# Altium PCB PCB.pcbdoc (part 2 of 2)
Units mil, origin at the board's own origin, x right, y up, seen from the top; angles counter-clockwise.
Board outline 3007 x 2843 mil, 2 copper layers (Top Layer, Bottom Layer); 56 components, 63 nets, 248 pads, 115 vias.
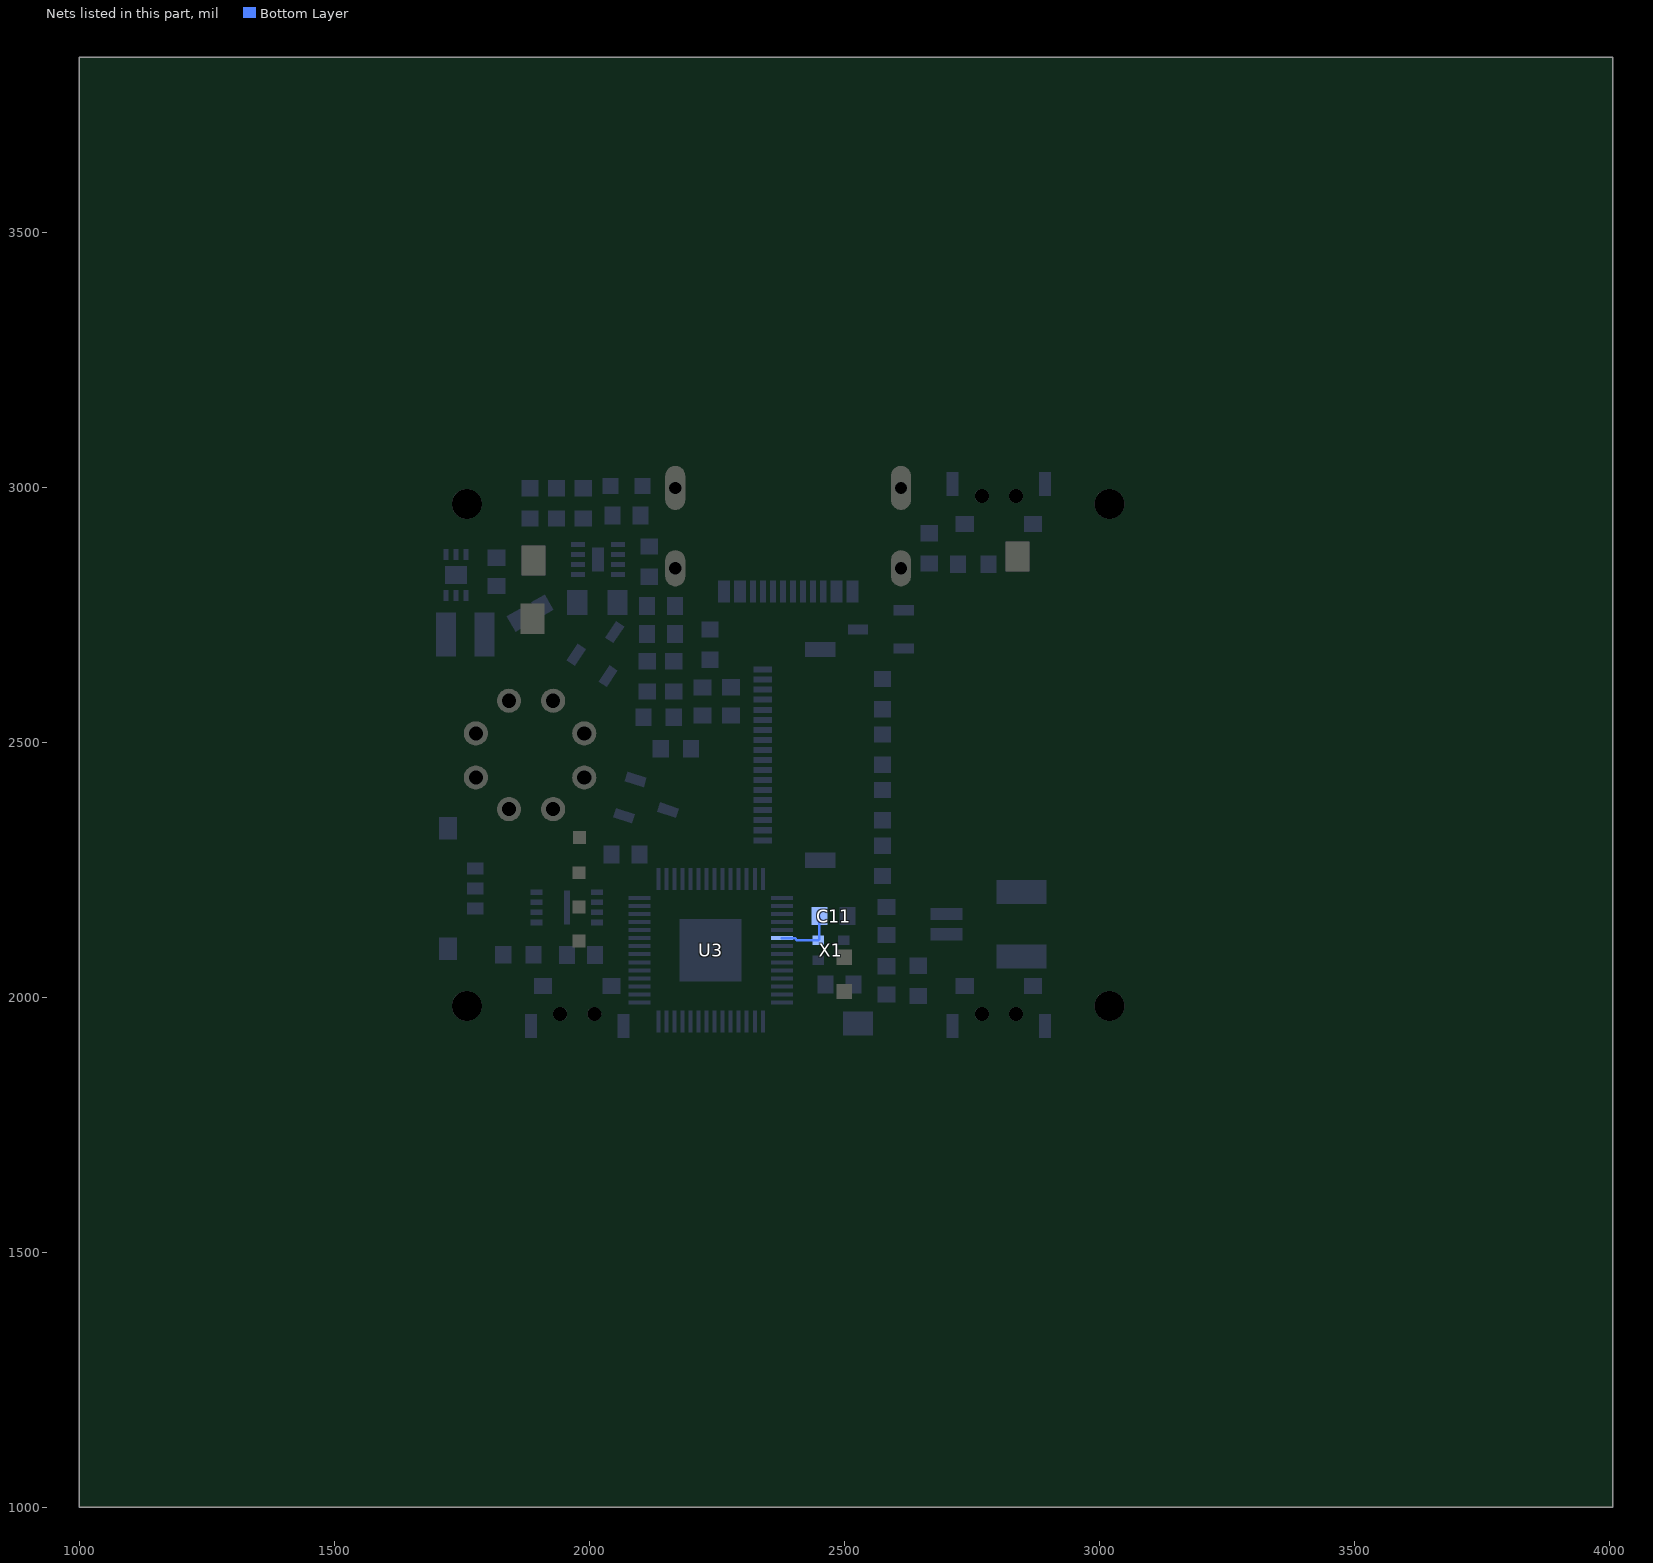
[diagram p2: the nets of this part, all layers, seen from the top]

## Via types
v1: diameter 24.41, hole 12.2, Top Layer to Bottom Layer, tented both sides, 77 vias
v2: diameter 17.72, hole 7.87, Top Layer to Bottom Layer, tented both sides, 36 vias
v3: diameter 23.62, hole 11.81, Top Layer to Bottom Layer, tented both sides, 2 vias

## Nets (pads, with @x,y where several pads share a name; then routed paths per layer and width w, separated by ;. In a path a pad name is that pad's centre, name@x,y a point inside that pad or via, vN(x,y) a via of type N, cw(c..) or ccw(c..) an arc to the next point about the centre after c; other vN are vias at no path point) (continued)
XTAL_P: C11.2 U3.20 X1.3 | length 121.9
  Bottom Layer w5: U3.20@2377.74,2115.66 2403.34,2115.66 2407.74,2111.16 2448.84,2111.16 2451.44,2113.76 C11.2@2451.45,2159
pads on no net: SW1. SW2. SW3. SW4.1 U1.1 U3.13 U3.17 U3.18 U3.27 U3.28 U3.29 U3.30 U3.31 U3.32 U3.34 U3.35 U3.37 U3.39 U3.40 U3.41 U5.9 U7.2 USB2.3 USB2.9

## Polygon pours and split planes (outlines as drawn)
GND on Top Layer (solid): 1514,3265 3236,3265 3336,3165 3336,1808 3307,1779 1521,1779 1514,1786
GND on Bottom Layer (solid): 1507,3343 3486,3343 3507,3322 3507,1586 3421,1500 1586,1500 1500,1586

## Keep-outs
Keep-Out Layer:
  lines w10: 3019.84,1904.02 ccw(c3019.84,1982.76) 3098.58,1982.76 ; 3019.84,3045.75 cw(c3019.84,2967.01) 3098.58,2967.01
  lines w10 net S$37925: 2665.51,2730.78 cw(c2724.57,2730.78) 2724.57,2789.84 ; 2842.68,2789.84 ccw(c2842.68,2848.89) 2901.73,2848.89
  lines w10 net S$70340: 1681.26,1982.76 ccw(c1760,1982.76) 1760,1904.02 ; 1681.26,2966.13 cw(c1760,2967.01) 1760.81,3045.74

## Other copper
Top Layer:
  region net SWCLK: 2487.5,2093 2512.5,2093 2505,2102 2495,2102
  region net SWD: 2485,1998.5 2485,2023.5 2470,2016 2470,2006
  region net U0_TX0: 1992.5,2183.25 1992.5,2170.75 2000,2174.5 2000,2179.5
  region net U0_RX0: 1992.5,2250.25 1992.5,2237.75 2000,2241.5 2000,2246.5
  region net SWD: 2437.09,2002.38 2431.58,2014.47 2437.7,2016 2442.25,2006
  region net RST: 2375.57,1947.19 2362.84,1934.04 2359.58,1942.96 2366.54,1950.15
  region net SWCLK: 2427.14,2023.36 2427.14,2036.64 2420.94,2035 2420.94,2025
  region net U0_TX0: 2146.14,2190.36 2146.14,2203.64 2139.94,2199.5 2139.94,2194.5
  region net U0_RX0: 2188.55,2204.84 2179.16,2195.45 2177.7,2202.76 2181.24,2206.3
  region net 3V3: 2293.64,2449.86 2280.36,2449.86 2282,2456.06 2292,2456.06
  region net 3V3: 2161.64,2302.86 2148.36,2302.86 2150,2309.06 2160,2309.06
  region net ADC: 2540.99,2128.14 2540.95,2109.83 2532.41,2115 2532.43,2123
  region net ADC: 2216.84,1995.44 2207.45,2004.84 2213.7,2007.36 2219.36,2001.7
  region net KEY: 2252.6,1990.86 2245.05,2001.8 2252.49,2001.94 2255.37,1997.75
  region net 1.1V: 2440.93,1969.85 2440.93,1988.15 2432.38,1984 2432.38,1974
  region net 1.1V: 2335.15,2086.93 2316.85,2086.92 2321,2078.38 2331,2078.39
  region net SCL: 2446.65,2198.55 2435.28,2205.42 2433.35,2199.34 2442.16,2194.01
  region net SDA: 2425.64,2212.86 2412.36,2212.86 2414,2219.06 2424,2219.06
  region net USB_D-: 2147.64,2047.86 2134.36,2047.86 2138.5,2053 2143.5,2053
  region net USB_D+: 2157.56,2070.84 2148.16,2061.45 2146.71,2068.76 2150.24,2072.3
  region net TP_SDA: 2209.84,2346.44 2200.44,2355.84 2207.76,2357.29 2211.29,2353.76
  region net TP_SCL: 2223.86,2369.36 2223.86,2382.64 2230.06,2378.5 2230.06,2373.5
  region net TP_SDA: 2283.14,2379.36 2283.14,2392.64 2276.94,2388.5 2276.94,2383.5
  region net TP_SCL: 2286.14,2406.36 2286.14,2419.64 2283,2415.5 2283,2410.5
  region net BLK: 2473.6,2346.8 2464.2,2337.4 2460.98,2342.95 2468.05,2350.02
  region net BLK: 2205.86,2302.36 2205.86,2315.64 2212.06,2314 2212.06,2304
  region net BAT: 1800.85,2306.92 1819.15,2306.92 1820,2298.38 1800,2298.38
  region net BAT: 1810.77,2327.18 1797.82,2314.23 1791.18,2319.68 1805.32,2333.82
  region net BAT: 1800.85,2273.84 1819.15,2273.84 1820,2265.3 1800,2265.3
  region net BAT: 1800.85,2289.99 1819.15,2289.99 1820,2298.53 1800,2298.53
  region net BAT: 1819.15,2260.07 1800.85,2260.07 1800,2268.62 1820,2268.61
  region net DCDC_VIN: 1788.85,2877.93 1807.15,2877.93 1808,2869.38 1788,2869.38
  region net DCDC_VIN: 1725.18,2608.24 1712.24,2621.18 1717.68,2627.82 1731.82,2613.68
  region net CAM_VDD: 2146.84,2143.45 2137.45,2152.84 2142.99,2156.06 2150.06,2148.99
  region net CS: 2307.07,2327.85 2307.07,2346.15 2315.62,2339.5 2315.62,2334.5
  region net CS: 2397.07,2484.85 2397.07,2503.16 2405.62,2496.5 2405.62,2491.5
  region net DC: 2398.59,2531.55 2395.29,2513.54 2404.89,2518.5 2405.8,2523.5
  region net DC: 2289.07,2303.85 2289.07,2322.15 2297.61,2315.5 2297.61,2310.5
  region net BAT: 1887.08,2863.85 1887.08,2882.15 1895.62,2882.84 1895.62,2863.16
  region net BAT: 1873.39,2862.16 1868.95,2879.92 1860.5,2879 1865.5,2859
  region net BAT: 1911.08,2863.85 1911.08,2882.15 1919.62,2882.84 1919.62,2863.16
  region net BAT: 1894.93,2863.85 1894.93,2882.15 1886.39,2882.84 1886.39,2863.16
  region net CAM_VDD: 2065.77,2610.18 2052.82,2597.24 2049.72,2606.21 2056.79,2613.28
  region net SCL: 2046.66,2531.16 2033.38,2531.12 2035.04,2524.93 2045.04,2524.96
  region net SDA: 2018.86,2567.36 2018.86,2580.64 2025.06,2579 2025.06,2569
  region net 3V3: 2398.93,2624.85 2398.93,2643.16 2390.39,2639.91 2390.39,2628.09
  region net 3V3: 2398.93,2624.85 2398.93,2643.16 2390.39,2639 2390.39,2629
  region net RST: 1883.66,2027.84 1870.38,2027.88 1872.04,2034.08 1882.04,2034.04
  region net KEY: 2736.63,2883.17 2727.16,2892.48 2725.76,2885.16 2729.33,2881.65
  region net USB_D+: 2427.82,2744.12 2427.78,2730.84 2433.99,2734.96 2434.01,2739.96
  region net USB_D-: 2405.37,2746.83 2392.78,2751.07 2394.46,2743.96 2399.73,2742.18
  region net USB_D-: 2366.83,2744.12 2366.78,2730.84 2372.99,2734.96 2373.01,2739.96
  region net +5V: 2306.73,2756.76 2294.2,2769.29 2299.35,2775.83 2313.27,2761.91
  region net +5V: 2287.13,2748.64 2287.13,2766.36 2278.86,2767.34 2278.86,2747.66
  region net +5V: 2485.68,2769.29 2473.16,2756.76 2466.61,2761.91 2480.53,2775.83
  region net 3V3: 2160.85,2456.07 2179.16,2456.07 2175.91,2464.62 2164.1,2464.62
  region net 3V3: 2169.2,2435.82 2158.02,2450.32 2153.77,2441.84 2159.93,2433.86
  region net C3_1: 2451.66,2328.16 2438.38,2328.12 2439.14,2321.92 2450.95,2321.96
  region net C1_1: 2086.87,2725.91 2086.87,2744.21 2078.33,2740.06 2078.33,2730.06
  region net 3V3: 2084.07,2648.85 2084.07,2667.15 2092.62,2663.91 2092.62,2652.09
  region net +5V: 2009.85,2933.93 2028.15,2933.93 2028.84,2925.39 2009.16,2925.39
  region net BAT: 2536.79,2494.57 2555.1,2494.57 2550.94,2503.12 2540.94,2503.12
  region net +5V: 2054.18,2896.76 2041.24,2883.82 2046.79,2877.29 2060.71,2891.21
  region net +5V: 2042.77,2908.18 2029.82,2895.24 2023.29,2900.79 2037.21,2914.71
  region net BAT: 1982.93,2885.85 1982.93,2904.16 1974.39,2904.84 1974.39,2885.16
  region net BAT: 2003.18,2895.77 1990.24,2882.82 1999.22,2879.72 2006.29,2886.79
  region net C1_1: 1927.8,2392.16 1952.87,2367.12 1955.56,2387.8 1948.48,2394.87
  region net BAT: 1867,2886 1867,2826 1915,2826 1914,2827 1914,2886
Bottom Layer:
  region net XTAL_P: 2437.57,2117.46 2437.57,2104.96 2430.07,2108.71 2430.07,2113.71
  region net XTAL_P: 2457.69,2120.56 2445.19,2120.56 2448.94,2128.06 2453.94,2128.06
  region net XTAL_N: 2487.8,2078.74 2499.83,2082.14 2488.67,2086.78 2483.16,2085.22
  region net XTAL_N: 2510.44,2066.54 2510.44,2079.04 2517.94,2075.29 2517.94,2070.29
  region net +5V: 2283.74,2773.96 2307.34,2773.96 2304.88,2757.56 2285.2,2757.56
  region net R6_1: 2334.84,2773.96 2346.64,2773.96 2343.24,2766.46 2338.24,2766.46
  region net USB_D-: 2354.69,2773.96 2366.34,2773.96 2363.44,2766.46 2358.44,2766.46
  region net USB_D+: 2374.24,2773.96 2386.04,2773.96 2382.54,2766.46 2377.54,2766.46
  region net USB_D-: 2394.69,2773.96 2405.74,2773.96 2403.44,2766.46 2398.44,2766.46
  region net USB_D+: 2413.64,2773.96 2425.44,2773.96 2421.94,2766.46 2416.94,2766.46
  region net +5V: 2472.64,2773.96 2496.34,2773.96 2494.68,2757.66 2475,2757.66
  region net CHA: 2088.75,3002.12 2088.75,2989.62 2081.25,2984.83 2081.25,2991.9
  region net R5_2: 2025.75,3014.46 2025.75,2989.46 2010.75,2996.96 2010.75,3006.96
  region net 3V3: 1699.89,2667.69 1739.26,2667.69 1733.32,2653.46 1705.76,2653.46
  region net 3V3: 1734.11,2754.31 1704.58,2754.31 1713.44,2772.02 1725.25,2772.02
  region net FPC3_17: 2322.55,2628.43 2322.55,2616.62 2313.94,2617.56 2313.94,2627.56
  region net C3_1: 2325.48,2596.94 2355.01,2596.94 2346.15,2583.16 2334.34,2583.16
  region net C3_1: 2355.01,2589.06 2325.48,2589.06 2334.34,2602.86 2346.15,2602.86
  region net C3_1: 2357.99,2577.25 2357.99,2589.06 2368.84,2589.07 2368.84,2577.26
  region net DC: 2357.99,2518.2 2357.99,2530.01 2365.49,2526.55 2365.49,2521.55
  region net CS: 2357.99,2498.51 2357.99,2510.32 2365.49,2506.91 2365.49,2501.91
  region net SCLK: 2322.55,2490.64 2322.55,2478.83 2315.05,2482.26 2315.05,2487.26
  region net MOSI: 2322.55,2470.95 2322.55,2459.14 2315.05,2462.56 2315.05,2467.56
  region net L_RST: 2357.99,2439.45 2357.99,2451.27 2365.49,2447.86 2365.49,2442.86
  region net TP_SCL: 2322.55,2411.9 2322.55,2400.09 2315.05,2403.49 2315.05,2408.49
  region net TP_SDA: 2322.55,2392.21 2322.55,2380.4 2315.05,2383.5 2315.05,2388.5
  region net L_RST: 2357.99,2360.72 2357.99,2372.53 2365.49,2369.16 2365.49,2364.16
  region net C3_1: 2357.99,2321.35 2357.99,2333.16 2375.71,2333.17 2375.71,2321.36
  region net RST: 1891.9,2028.41 1891.9,2015.91 1884.4,2019.66 1884.4,2024.66
  region net KEY: 2729.96,2911.88 2742.46,2911.88 2738.65,2904.38 2733.65,2904.38
  region net C1_1: 2075,2786.2 2060.87,2749.45 2081.36,2736.91 2087.54,2753
  region net C1_1: 2075,2749.45 2075,2786.69 2098.62,2774.88 2098.62,2759.13
  region net R1_2: 1996.26,2786.14 1981.96,2749.45 2002.46,2737 2008.71,2753.03
  region net BAT: 1968.3,2892.45 1991.41,2882.89 1994.55,2891.4 1986.03,2897.03
  region net CHA: 2070.15,2843.22 2070.15,2853.07 2072.16,2850.66 2072.16,2845.66
  region net +5V: 2042.59,2882.99 2065.73,2892.45 2047.06,2898.01 2038.51,2892.43
  region net +5V: 2042.59,2882.99 2065.73,2892.45 2047.06,2898.01 2038.51,2892.43
  region net DCDC_VIN: 1763.61,2879.18 1753.77,2857.53 1758.45,2854.45 1769.94,2871.24
  region net DCDC_VIN: 1753.77,2879.18 1753.77,2857.53 1739,2863.35 1739,2873.35
  region net DCDC_VIN: 1743.92,2857.53 1743.92,2879.18 1758.69,2873.35 1758.69,2863.35
  region net R9_1: 2253.95,2728.66 2253.95,2704.84 2268.95,2711.16 2268.95,2721.16
  region net FPC3_17: 2253.95,2660.06 2233.61,2645.53 2251.42,2639.82 2259.67,2645.71
  region net R6_1: 2134.95,2825.3 2134.95,2812.8 2142.45,2808.02 2142.45,2815.09
  region net +5V: 2005.01,2954.22 2005.01,2929.46 2019.04,2936.96 2019.04,2946.96
  region net R5_2: 2005.01,2989.46 2005.01,3013.53 2020.01,3006.96 2020.01,2996.96
  region net BLK: 2557.94,2334.34 2557.94,2359.34 2542.94,2351.84 2542.94,2341.84
  region net R3_2: 2557.94,2418.66 2557.94,2393.66 2543.24,2401.16 2543.24,2411.16
  region net SDA: 2160.12,2583.53 2148.93,2589.11 2145.49,2582.45 2150.21,2580.09
  region net R1_2: 2182.95,2648.69 2171.9,2642.84 2181.65,2639.52 2186.28,2641.96
  region net R1_2: 2148.93,2669 2160.11,2674.59 2150.21,2678.03 2145.5,2675.67
  region net SCL: 2090.41,2532.05 2090.41,2543.21 2082.91,2539.46 2082.91,2534.46
  region net R1_2: 2175.88,2566.07 2181.47,2554.89 2184.9,2564.79 2182.55,2569.5
  region net ADC: 2565.28,2131.44 2565.28,2111.44 2553.28,2117.44 2553.28,2125.44
  region net ADC: 2592.65,2137.19 2600.72,2113.53 2609.2,2135.13 2605.6,2145.67
  region net +5V: 2029.69,2956.46 2029.69,2931.46 2021.04,2938.96 2021.04,2948.96
  region net C3_1: 2260.23,2622.42 2260.23,2592.9 2250.64,2601.76 2250.64,2613.57
  region net C3_1: 2295.66,2591.87 2295.66,2617.62 2313.38,2608.77 2313.38,2596.95
  region net C3_1: 2239.72,2592.2 2239.72,2621.72 2250.04,2612.86 2250.04,2601.05
  region net C1_1: 2097.7,2749.3 2129.2,2749.3 2121.32,2725.68 2105.57,2725.68
  region net C1_1: 2097.7,2784.7 2097.7,2749.3 2074.08,2759.13 2074.08,2774.88
  region net C1_1: 2097.7,2712.45 2127.52,2729.7 2101.32,2738.43 2088.97,2731.28
  region net C1_1: 2129.2,2729.7 2097.7,2729.7 2105.57,2753.32 2121.32,2753.32
  region net R9_1: 2507.63,2711.16 2507.63,2728.66 2492.63,2721.16 2492.63,2711.16
  region net R3_2: 2619.18,2748.76 2597,2760.28 2590.28,2746.87 2599.58,2742.03
  region net R1_2: 2037.14,2714.31 2040.26,2723.53 2049.06,2731.98 2037.14,2714.31
  region net R1_2: 2030.79,2704.89 2037.14,2714.31 2034.94,2707.79 2030.79,2704.89
  region net R1_2: 2060.52,2713.76 2053.53,2703.4 2061,2701.06 2063.85,2705.29
  region net 3V3: 1990.82,2684.36 1972.07,2649.51 2017.71,2659.55 2030.42,2683.17
  region net 3V3: 1955.75,2660.52 1977.77,2693.16 1947.52,2711.68 1934.07,2691.73
  region net CAM_VDD: 2055.05,2638.77 2034.08,2607.68 2056.58,2598.79 2065.55,2612.09
  region net U7_6: 1901.01,2937.18 1880.79,2922.47 1898.48,2916.79 1906.67,2922.75
  region net U7_7: 1935.44,2922.47 1953.01,2922.47 1952.94,2907.47 1942.94,2907.47
  region net 3V3: 1874.78,2083.33 1885.82,2100.01 1874.56,2104.74 1870.06,2097.93
  region net 3V3: 1906.53,2086.25 1891.88,2065.99 1906.28,2060.31 1912.22,2068.52
  region net RST: 1825.09,2065.99 1837.59,2065.99 1833.84,2058.49 1828.84,2058.49
  region net ADC: 2591.95,2284.26 2591.95,2309.26 2593.14,2301.76 2593.14,2291.76
  region net ADC: 2591.95,2284.26 2591.95,2309.26 2596.24,2301.76 2596.24,2291.76
  region net ADC: 2591.95,2468.36 2591.95,2443.36 2592.64,2450.86 2592.64,2460.86
  region net BAT: 2577.45,2499.24 2557.94,2514.86 2552.45,2500.04 2560.3,2493.75
  region net DCDC_VIN: 1800.32,2877.27 1800.32,2845.77 1770.32,2851.52 1770.32,2871.52
  region net 3V3: 1882.57,2731.81 1837.58,2746.75 1846.26,2700.31 1873.82,2691.16
  region net 3V3: 1882.57,2731.81 1837.75,2746.46 1848.23,2715.42 1871.85,2711.56
  region net XTAL_P: 2445.19,2141.26 2457.69,2141.26 2453.94,2133.76 2448.94,2133.76
  region net XTAL_N: 2565.28,2076.31 2565.28,2066.54 2557.78,2070.29 2557.78,2075.29
  region net CAM_VDD: 2096.93,2583.53 2096.93,2615.28 2073.31,2605.84 2073.31,2590.09
  region net 3V3: 2096.93,2674.59 2096.93,2642.84 2076.29,2646.15 2076.04,2669.77
  region net R3_2: 2557.94,2565.49 2578.09,2580.28 2560.44,2585.93 2552.28,2579.95
  region net R3_2: 2563.55,2548.53 2557.94,2572.89 2547.83,2549.92 2550.48,2538.43
  region net QSPI_SD0: 1908.46,2140.96 1908.46,2151.98 1915.96,2148.96 1915.96,2143.96
  region net QSPI_SCLK: 1884.84,2171.67 1884.84,2160.65 1883.14,2163.66 1883.14,2168.66
  region net QSPI_SD3: 1884.84,2191.35 1884.84,2180.33 1882.56,2183.26 1882.54,2188.26
  region net 3V3: 1886.4,2200.02 1884.84,2211.04 1874.29,2199.94 1875.69,2190.02
  region net 3V3: 1884.84,2211.04 1908.46,2209.6 1922,2223.81 1908.67,2224.62
  region net QSPI_SD2: 2027.15,2160.65 2027.15,2171.67 2034.65,2168.66 2034.65,2163.66
  region net QSPI_SD1: 2027.15,2180.33 2027.15,2191.35 2028.16,2188.34 2028.16,2183.34
  region net QSPI_SS: 2027.15,2200.02 2027.15,2211.04 2034.65,2208.06 2034.65,2203.06
  region net QSPI_SS: 2076.58,2198.3 2076.58,2190.42 2074.64,2191.86 2074.64,2196.86
  region net QSPI_SD1: 2076.58,2182.56 2076.58,2174.68 2069.08,2176.12 2069.08,2181.12
  region net QSPI_SD2: 2076.58,2166.81 2076.58,2158.93 2069.08,2160.37 2069.08,2165.37
  region net QSPI_SCLK: 2076.58,2135.31 2076.58,2127.43 2070.64,2128.86 2070.64,2133.86
  region net QSPI_SD3: 2076.58,2119.56 2076.58,2111.68 2069.08,2113.16 2069.08,2118.16
  region net USB_D+: 2119.89,2048.69 2119.89,2056.57 2126.63,2055.13 2126.63,2050.13
  region net USB_D-: 2119.89,2032.94 2119.89,2040.82 2123.86,2039.36 2123.86,2034.36
  region net RST: 2399.42,2017.2 2399.42,2025.08 2399.84,2023.66 2399.84,2018.66
  region net SWD: 2399.42,2032.94 2399.42,2040.82 2406.92,2038.53 2406.92,2033.53
  region net SWCLK: 2399.42,2048.69 2399.42,2056.57 2406.92,2055.13 2406.92,2050.13
  region net XTAL_N: 2399.42,2095.94 2399.42,2103.82 2402.14,2102.36 2402.14,2097.36
  region net XTAL_P: 2399.42,2111.68 2399.42,2119.56 2403.38,2118.12 2403.38,2113.12
  region net CAM_VDD: 2336.43,2210.11 2344.3,2210.11 2342.86,2205.36 2337.86,2205.36
  region net CS: 2312.8,2253.42 2304.93,2253.42 2306.36,2260.92 2311.36,2260.92
  region net DC: 2297.05,2253.42 2289.18,2253.42 2290.62,2260.92 2295.62,2260.92
  region net 3V3: 2281.3,2253.42 2273.43,2253.42 2274.84,2259.66 2279.84,2259.66
  region net SCLK: 2249.81,2253.42 2241.94,2253.42 2243.34,2256.16 2248.34,2256.16
  region net BLK: 2218.31,2253.42 2210.44,2253.42 2211.88,2260.92 2216.88,2260.92
  region net TP_SCL: 2202.56,2253.42 2194.69,2253.42 2196.14,2260.92 2201.14,2260.92
  region net TP_SDA: 2186.82,2253.42 2178.95,2253.42 2180.34,2260.92 2185.34,2260.92
  region net U0_RX0: 2163.2,2210.11 2171.07,2210.11 2169.64,2205.87 2164.64,2205.87
  region net U0_TX0: 2147.45,2210.11 2155.32,2210.11 2154.4,2202.61 2149.4,2202.61
  region net DCDC_VIN: 1760.83,2224.81 1760.83,2201.19 1753.04,2202.96 1753.04,2222.96
  region net BAT: 1792.32,2240.56 1792.32,2264.18 1810,2262 1809.89,2242
  region net BAT: 1760.83,2264.18 1792.32,2240.56 1806.08,2267.74 1789.92,2279.86
  region net BAT: 1760.83,2264.18 1792.32,2240.56 1797.84,2255.95 1778.9,2272.37
  region net 1.1V: 2447.69,2007.28 2465.5,2007.28 2458,2006 2448,2006
  region net 1.1V: 2475.94,2042.72 2450.94,2042.72 2458.44,2045.56 2468.44,2045.56
  region net 3V3: 1995.81,2065.28 2016.78,2065.28 1996.35,2050.28 1982.21,2050.28
  region net 3V3: 2027.31,2070.5 2027.31,2095.5 2042.31,2088 2042.31,2078
  region net 3V3: 2008.1,2065.28 1995.81,2087.06 1989.39,2067.91 1994.49,2058.86
  region net 3V3: 1962.92,2302.84 1962.92,2321.15 1954.38,2317 1954.38,2307
  region net SWD: 2430.59,2014.71 2420.16,2006.49 2419.55,2013.91 2423.51,2017.03
  region net RST: 2387.18,1934.19 2374.28,1947.18 2385.03,1948.48 2388.55,1944.94
  region net SWCLK: 2433.56,2038.84 2424.16,2029.45 2422.7,2036.76 2426.24,2040.3
  region net U0_TX0: 2158.54,2202.97 2145.25,2202.74 2149.29,2209.01 2154.28,2209.1
  region net U0_RX0: 2182.14,2189.36 2182.14,2202.64 2177,2198.5 2177,2193.5
  region net 3V3: 2287.55,2435.16 2278.16,2444.55 2276.7,2437.24 2280.24,2433.7
  region net 3V3: 2151.34,2288.93 2147.45,2301.64 2141.81,2298.89 2145.13,2288.06
  region net ADC: 2558.39,2111.11 2555.66,2129.22 2564.87,2125.44 2566.07,2117.44
  region net ADC: 2208.55,1987.16 2199.16,1996.55 2196.64,1990.3 2202.3,1984.64
  region net KEY: 2244.55,1984.16 2235.16,1993.56 2232.64,1987.3 2238.3,1981.64
  region net 1.1V: 2439.85,1987.07 2458.15,1987.07 2454,1995.62 2444,1995.62
  region net 1.1V: 2335.15,2103.07 2316.85,2103.07 2321,2111.62 2331,2111.61
  region net 1.1V: 2326.76,2082.82 2313.82,2095.76 2311.42,2086.08 2317.08,2080.42
  region net SCL: 2446.61,2198.53 2435.28,2205.47 2433.32,2199.39 2442.1,2194.03
  region net SDA: 2419.55,2198.16 2410.16,2207.55 2406.94,2202.01 2414.01,2194.94
  region net USB_D-: 2135.14,2035.35 2135.14,2048.64 2129,2044.5 2129,2039.5
  region net USB_D+: 2151.14,2055.35 2151.14,2068.64 2144.94,2064.5 2144.94,2059.5
  region net TP_SDA: 2198.98,2338.37 2192.69,2350.08 2189.14,2343.59 2191.61,2338.99
  region net TP_SCL: 2224.66,2370.17 2211.38,2370.12 2215.54,2363.93 2220.54,2363.95
  region net TP_SDA: 2294.86,2379.36 2294.86,2392.64 2301.06,2388.5 2301.06,2383.5
  region net TP_SCL: 2291.45,2404.16 2300.84,2413.56 2300.78,2407.76 2297.24,2404.22
  region net BLK: 2481.88,2337.41 2472.49,2346.8 2478.03,2350.03 2485.11,2342.95
  region net BLK: 2208.84,2309.56 2199.45,2300.16 2206.76,2298.71 2210.3,2302.24
  region net DCDC_VIN: 1703.85,2589.83 1722.16,2589.83 1723,2598.38 1703,2598.38
  region net DCDC_VIN: 1703.85,2573.69 1722.16,2573.69 1723,2565.14 1703,2565.14
  region net BAT: 1800.85,2306.92 1819.15,2306.92 1820,2298.38 1800,2298.38
  region net BAT: 1808.74,2269.77 1798.11,2284.68 1790.59,2280.52 1802.36,2264.01
  region net BAT: 1819.15,2273.84 1800.85,2273.84 1800,2265.3 1820,2265.3
  region net BAT: 1800.85,2289.99 1819.15,2289.99 1820,2298.53 1800,2298.53
  region net BAT: 1802.03,2261.24 1801.83,2242.93 1793.27,2242.18 1793.49,2262.18
  region net BAT: 1819.15,2260.07 1800.85,2260.07 1800,2268.62 1820,2268.61
  region net DCDC_VIN: 1722.15,2600.93 1703.85,2600.93 1703,2592.38 1723,2592.39
  region net CAM_VDD: 2146.07,2147.66 2133.36,2151.55 2138.83,2156.36 2144.24,2154.7
  region net CS: 2311.18,2337.76 2298.24,2324.82 2307.1,2325.37 2310.63,2328.91
  region net CS: 2389.76,2506.18 2376.82,2493.24 2376.82,2502.64 2380.36,2506.18
  region net DC: 2380.95,2533.17 2380.91,2514.86 2372.38,2521.53 2372.39,2526.53
  region net DC: 2290.15,2304.93 2271.85,2304.92 2278.5,2296.38 2283.5,2296.38
  region net CAM_VDD: 2073.1,2607.14 2073.05,2588.83 2081.6,2590.09 2081.64,2605.84
  region net CAM_VDD: 2067.57,2609.93 2052.84,2599.06 2048.73,2606.64 2061.54,2616.1
  region net SCL: 2045.88,2543.62 2045.84,2530.34 2052.05,2534.46 2052.07,2539.46
  region net SDA: 2007.14,2567.36 2007.14,2580.64 2000.94,2576.5 2000.94,2571.5
  region net SDA: 2018.88,2580.62 2018.84,2567.34 2025.05,2571.46 2025.07,2576.46
  region net RST: 1882.95,2015.44 1882.77,2028.72 1889.03,2024.66 1889.09,2019.66
  region net RST: 1871.16,2015.34 1871.12,2028.62 1864.93,2024.46 1864.95,2019.46
  region net KEY: 2742.71,2897.78 2729.43,2897.94 2733.64,2904.09 2738.64,2904.03
  region net USB_D+: 2427.22,2744.61 2414.23,2741.86 2416.94,2748.77 2421.94,2749.83
  region net USB_D+: 2416.1,2730.84 2416.06,2744.12 2409.87,2739.96 2409.89,2734.96
  region net USB_D-: 2407.59,2760.36 2394.3,2760.36 2398.44,2766.56 2403.44,2766.56
  region net USB_D-: 2367.59,2743.36 2354.3,2743.36 2358.44,2749.56 2363.44,2749.56
  region net +5V: 2303.85,2765.26 2286.13,2765.37 2285.2,2773.64 2304.88,2773.52
  region net +5V: 2493.75,2765.37 2476.03,2765.26 2475,2773.52 2494.68,2773.64
  region net C3_1: 2436.16,2334.55 2445.56,2325.16 2442.44,2323.09 2434.09,2331.43
  region net C3_1: 2451.64,2339.86 2438.36,2339.86 2439.1,2346.06 2450.91,2346.06
  region net C3_1: 2244.17,2600.34 2244.12,2613.62 2237.92,2612.86 2237.96,2601.05
  region net C3_1: 2256.22,2600.69 2255.49,2613.95 2261.72,2613.57 2262.37,2601.76
  region net C1_1: 2095.4,2747.26 2082.78,2733.99 2077.47,2740.8 2088.32,2752.22
  region net C1_1: 2107.12,2735.83 2094.18,2722.88 2101.82,2718.44 2111.57,2728.18
  region net 3V3: 2084.24,2649 2083.9,2667.3 2092.39,2670.12 2092.84,2646.5
  region net 3V3: 2076.77,2670.18 2063.82,2657.24 2055.9,2661.4 2072.61,2678.1
  region net +5V: 2028.1,2933.86 2025.94,2952.04 2034.91,2948.96 2036.1,2938.96
  region net +5V: 2010.95,2932.83 2010.9,2951.14 2002.37,2946.96 2002.4,2936.96
  region net +5V: 2009.85,2933.93 2028.15,2933.93 2026.88,2925.39 2011.13,2925.39
  region net BAT: 2558.12,2485.72 2545.2,2498.68 2554.18,2501.77 2561.24,2494.69
  region net +5V: 2053.61,2899.78 2044.31,2884.01 2053.37,2882.56 2059.26,2892.56
  region net +5V: 2042.77,2908.18 2029.82,2895.24 2024.69,2902.18 2035.82,2913.32
  region net +5V: 2053.61,2899.78 2044.31,2884.01 2053.37,2882.56 2059.26,2892.56
  region net BAT: 1988.4,2883.08 1979.5,2899.07 1974.86,2892.56 1980.43,2882.56
  region net SDA: 1948.48,2594.96 1940.57,2560.42 1960.07,2571.5 1961.21,2576.5
  region net L6_1: 1733,2799 1733,2776 1742.94,2766.06 1747,2760 1753,2751 1770,2722 1769.94,2707.06 1779.44,2695.06 1779.44,2667.06 1816,2667 1816,2755 1779,2764 1754,2770 1746,2776 1746,2799

## Silkscreen, mask and mechanical layers (free items; w line width, h text height)
Top Overlay:
  circle w39.37: c3019.84,1982.75 r35
  circle w39.37: c3019.84,2967 r35
  circle w39.37: c1760,1982.75 r35
  circle w39.37: c1760,2967 r35
  lines w7.87: 1859.78,2696.72 1958.21,2696.72 1958.21,2787.27 1859.78,2787.27 1859.78,2696.72 ; 1860.78,2816.72 1959.21,2816.72 1959.21,2907.27 1860.78,2907.27 1860.78,2816.72 ; 2775,2805.45 2873.43,2805.45 2873.43,2896 2775,2896 2775,2805.45
  lines w10: 1885,1940 2068,1940 2068,2051 1885,2051 1885,1940 ; 1886,2920 2069,2920 2069,3031 1886,3031 1886,2920 ; 2712,1940 2895,1940 2895,2051 2712,2051 2712,1940 ; 2712,2900 2895,2900 2895,3011 2712,3011 2712,2900
  text "USB" at 1926,2926 h40
  text "UP" at 2772,2891 h40
  text "B+" at 2767.68,2877.45 h31.5 r270
  text "B+" at 1966.53,2835.27 h31.5 r90
  text "B-" at 1968.5,2705.85 h31.5 r67
  text "ON" at 1692,2327.5 h25
  text "3V3" at 1881,2291.5 h25
  text "RX0" at 1881,2217.5 h25
  text "TX0" at 1879,2147.5 h25
  text "Umeko_rv2040" at 2041,2143 h78.74 r359
  text "B-" at 2741.68,2130.45 h31.5 r270
  text "GND" at 1878,2073.5 h25
  text "SWCLK" at 2537,2053.5 h25
  text "OFF" at 1695,2050.5 h25
  text "SWD" at 2537,1988.5 h25
  text "DOWN" at 2727,1977 h40
  text "RST" at 1927,1976 h40
  text "迷你热成像终端" at 2134,1922 h78.74
Bottom Overlay:
  circle w7.87: c1884.01,2474 r114.96
  circle w10: c1884.01,2474 r161.42
  circle w10: c3019.84,1982.75 r78.74
  circle w10: c3019.84,2967 r78.74
  circle w10: c1760,1982.75 r78.74
  circle w10: c1760,2967 r78.74
  lines w7.87: 2064.12,2458.25 2092.66,2458.25 2092.66,2489.75 2064.2,2489.75 ; 2064.41,2458.23 cw(c1884,2474) 2064.41,2489.77 ; 1859,2810.45 1957.43,2810.45 1957.43,2901 1859,2901 1859,2810.45
  lines w10 net S$69478: 2501.95,2359.06 2501.95,2617.06
  lines w10 net S$69482: 2478.94,2382.06 2501.94,2359.06 2524.94,2382.06
  lines w10 net S$69498: 2478.94,2382.06 2524.94,2382.06
  lines w10 net S$69502: 2487.38,2373.62 2516.51,2373.62 2524.94,2382.06
  text "1k" at 1985.78,2964.19 h15 r236
  text "300k" at 1908,2952.5 h15
  text "51k" at 1954,2952.5 h15
  text "1u" at 2087.21,2932.61 h15 r44
  text "B+" at 1967.75,2884 h31.5 r90
  text "5.1k" at 2685,2865.5 h15
  text "30k" at 2770.16,2864 h15 r90
  text "5.1k" at 2136,2839.5 h15
  text "22u" at 1836.07,2817.79 h15 r16
  text "10u" at 2155.5,2782 h15 r90
  text "3400" at 2598.5,2742 h15 r90
  text "22u" at 1882.5,2730.25 h15 r300
  text "0.1u" at 2155.5,2727 h15 r90
  text "6.2" at 2253,2675.5 h15
  text "3401" at 2052,2666.5 h15
  text "1" at 2542.94,2645.06 h40 r90
  text "1k" at 2167.78,2626.19 h15 r236
  text "30k" at 2131,2613.5 h15
  text "30k" at 2593,2579.5 h15
  text "0.1u" at 2240.13,2564.5 h15 r1
  text "10u" at 2293.39,2564.51 h15 r3
  text "1k" at 2142.48,2550.52 h15 r356
  text "30k" at 2185.5,2505 h15 r90
  text "300k" at 2612,2469.5 h15
  text "3401" at 2133.5,2406 h15 r90
  text "6.2" at 2602,2361.5 h15
  text "18" at 2542.94,2342.06 h40 r90
  text "0.1u" at 2087.5,2297 h15 r90
  text "680k" at 2608,2250.5 h15
  text "12p" at 2491.28,2175.81 h15 r104
  text "B+" at 2695,2170.25 h31.5
  text "0.1u" at 2608.55,2133.87 h15 r1
  text "1u" at 1999.5,2098 h15 r90
  text "10k" at 1877.5,2095 h15 r90
  text "0.1u" at 2505.5,2042 h15 r90
  text "1k" at 2655.78,2028.19 h15 r236
  text "12p" at 2605.81,2017.72 h15 r14
  text "B-" at 2567,1978.75 h31.5 r180